# EAGLE board eg3301_pcb v4 (EAGLE 9.7.0)
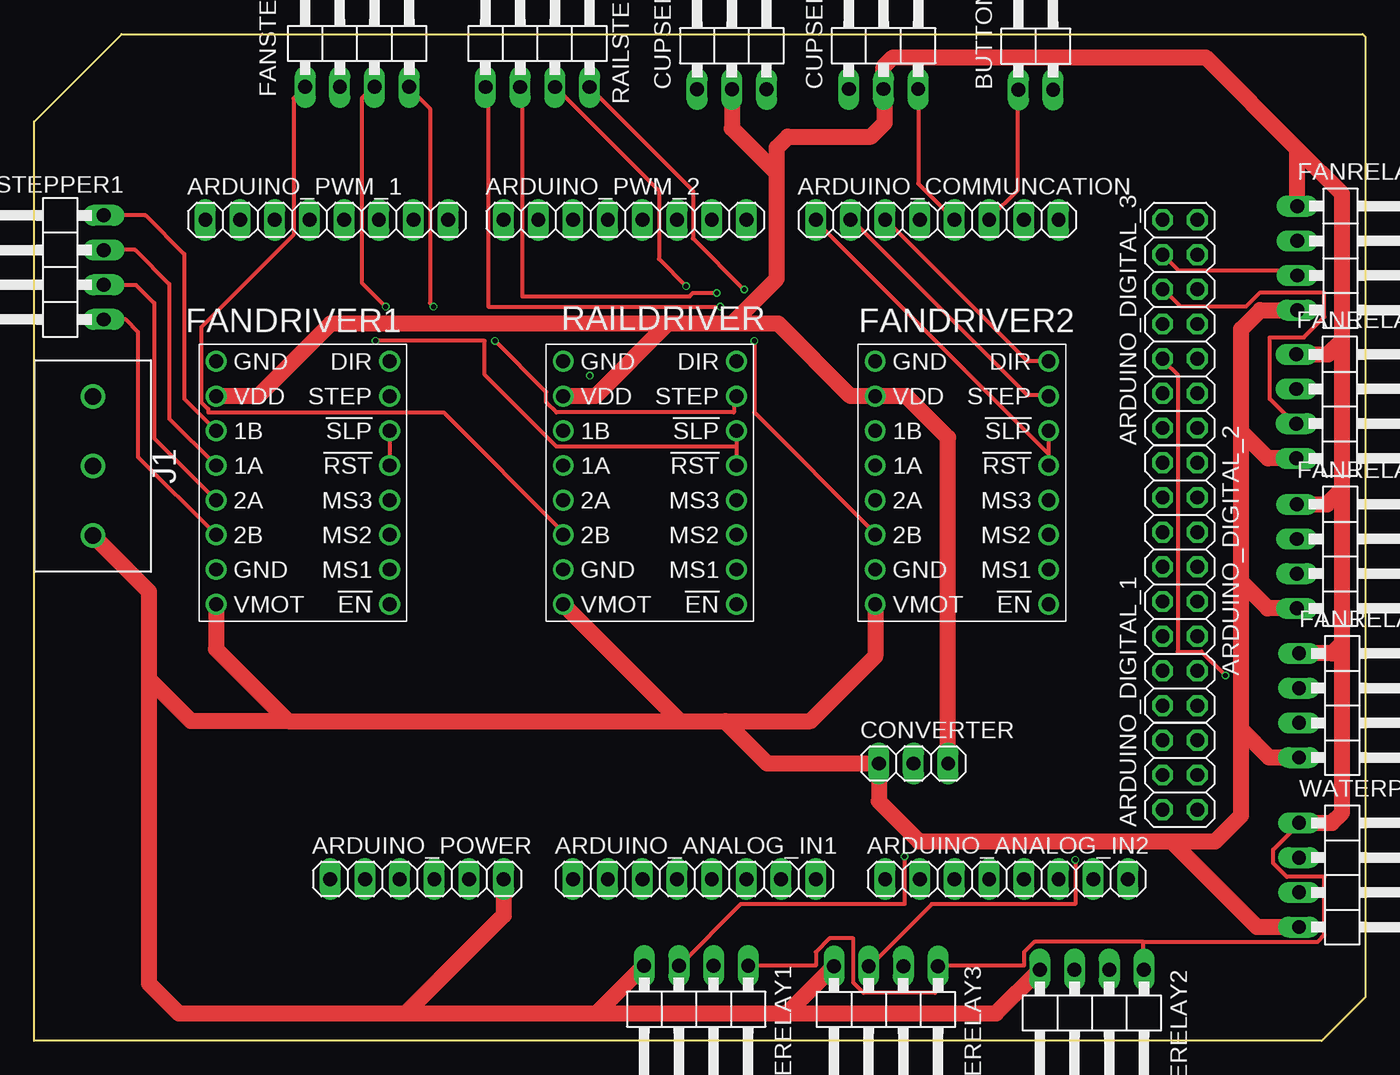
[diagram p0: board, top side]
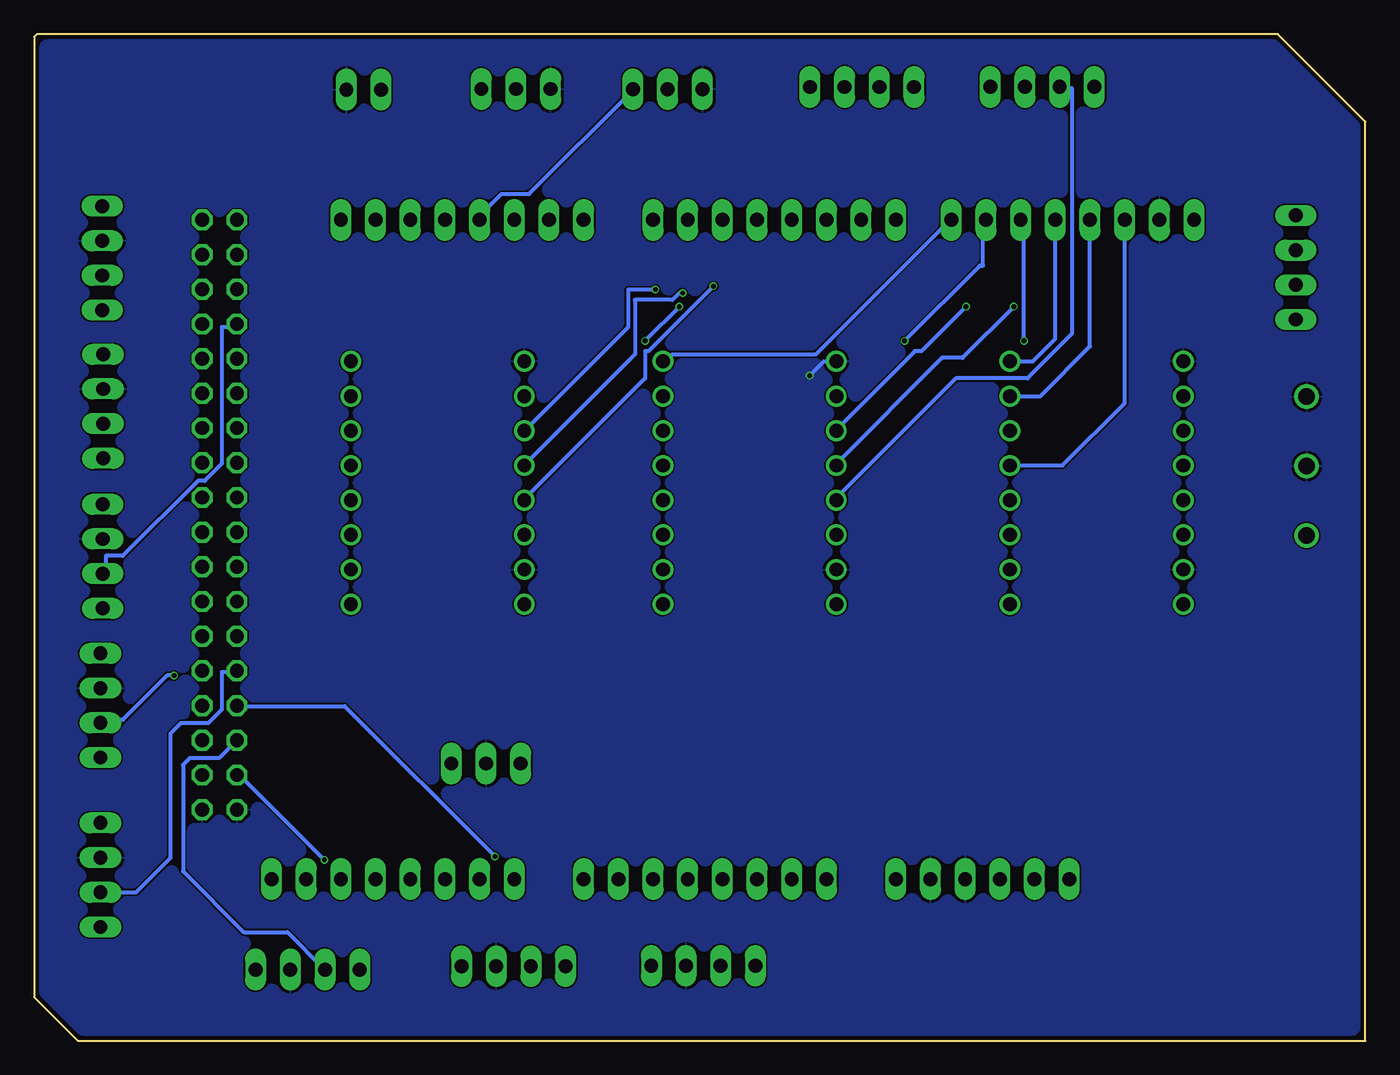
[diagram p1: board, bottom side, seen from below]

Size 97.5 x 73.7 mm. Coordinates in mm from the lower left corner, seen from the top.
Outline: 97.5,73.5 97.5,3.2 94.3,0 0,0 0,67.3 6.4,73.7 97.3,73.7 97.5,73.5
Copper layers (1*16): Top / Bottom
Stack-up Default Layer Stack: Top User Defined 0.035mm / Dielectric-1 User Defined 1.5mm / Bottom User Defined 0.035mm
Design rules "PCBWay_2L_100um-Track": minimum track width 0.1mm, minimum drill 0.3mm, track to track 0.1mm, track to pad 0.1mm, pad to pad 0.1mm, via to via 0.1mm, smd to smd 0mil, copper to edge 0.3mm, drill to drill 10mil, minimum pad ring 6mil, minimum via ring 0.1mm, stop-mask expansion 2mil, vias tented up to drill 0.45mm, thermal gap 0.2mm

## Footprints (pad centres in the part's own frame; a part is rotated, then mirrored left to right if it is on the bottom)
1X08 = drill 1.016 long: 1 -8.89,0; 2 -6.35,0; 3 -3.81,0; 4 -1.27,0; 5 1.27,0; 6 3.81,0; 7 6.35,0; 8 8.89,0
2X03 = drill 1.016 octagon: 1 -2.54,-1.27; 2 -2.54,1.27; 3 0,-1.27; 4 0,1.27; 5 2.54,-1.27; 6 2.54,1.27
2X08 = drill 1.016 octagon: 1 -8.89,-1.27; 2 -8.89,1.27; 3 -6.35,-1.27; 4 -6.35,1.27; 5 -3.81,-1.27; 6 -3.81,1.27; 7 -1.27,-1.27; 8 -1.27,1.27; 9 1.27,-1.27; 10 1.27,1.27; 11 3.81,-1.27; 12 3.81,1.27; 13 6.35,-1.27; 14 6.35,1.27; 15 8.89,-1.27; 16 8.89,1.27
2X07 = drill 1.016 octagon: 1 -7.62,-1.27; 2 -7.62,1.27; 3 -5.08,-1.27; 4 -5.08,1.27; 5 -2.54,-1.27; 6 -2.54,1.27; 7 0,-1.27; 8 0,1.27; 9 2.54,-1.27; 10 2.54,1.27; 11 5.08,-1.27; 12 5.08,1.27; 13 7.62,-1.27; 14 7.62,1.27
1X06 = drill 1.016 long: 1 -6.35,0; 2 -3.81,0; 3 -1.27,0; 4 1.27,0; 5 3.81,0; 6 6.35,0
1X02/90 = drill 1.016 long: 1 -1.27,-3.81; 2 1.27,-3.81
1X03 = drill 1.016 long: 1 -2.54,0; 2 0,0; 3 2.54,0
1X03/90 = drill 1.016 long: 1 -2.54,-3.81; 2 0,-3.81; 3 2.54,-3.81
A4988 = drill 1.016: 1 -6.35,8.89; 2 -6.35,6.35; 3 -6.35,3.81; 4 -6.35,1.27; 5 -6.35,-1.27; 6 -6.35,-3.81; 7 -6.35,-6.35; 8 -6.35,-8.89; 9 6.35,-8.89; 10 6.35,-6.35; 11 6.35,-3.81; 12 6.35,-1.27; 13 6.35,1.27; 14 6.35,3.81; 15 6.35,6.35; 16 6.35,8.89
1X04/90 = drill 1.016 long: 1 -3.81,-3.81; 2 -1.27,-3.81; 3 1.27,-3.81; 4 3.81,-3.81
TERMBLK_508-3N = drill 1.2: 1 0,0; 2 5.08,0; 3 10.16,0

## Placement (x,y rotation side)
ARDUINO_ANALOG_IN1  PINHD-1X8  [1X08]  48.36,11.84 0 top
ARDUINO_ANALOG_IN2  PINHD-1X8  [1X08]  71.22,11.84 0 top
ARDUINO_COMMUNCATION  PINHD-1X8  [1X08]  66.14,60.1 0 top
ARDUINO_DIGITAL_1  PINHD-2X3  [2X03]  83.92,19.46 90 top
ARDUINO_DIGITAL_2  PINHD-2X8  [2X08]  83.92,33.43 90 top
ARDUINO_DIGITAL_3  PINHD-2X7  [2X07]  83.92,52.48 90 top
ARDUINO_POWER  PINHD-1X6  [1X06]  28.04,11.84 0 top
ARDUINO_PWM_1  PINHD-1X8  [1X08]  21.43,60.1 0 top
ARDUINO_PWM_2  PINHD-1X8  [1X08]  43.28,60.1 0 top
BUTTON  PINHD-1X2/90  [1X02/90]  73.36,73.45 0 top
CONVERTER  PINHD-1X3  [1X03]  64.4,20.3 0 top
CUPSERVO1  PINHD-1X3/90  [1X03/90]  62.21,73.49 0 top
CUPSERVO2  PINHD-1X3/90  [1X03/90]  51.1,73.48 0 top
FANDRIVER1  1182-A4988  [A4988]  19.68,40.85 180 top
FANDRIVER2  1182-A4988  [A4988]  67.95,40.85 180 top
FANRELAY1  PINHD-1X4/90  [1X04/90]  96.32,57.3 270 top
FANRELAY2  PINHD-1X4/90  [1X04/90]  96.26,46.45 270 top
FANRELAY3  PINHD-1X4/90  [1X04/90]  96.29,35.47 270 top
FANRELAY4  PINHD-1X4/90  [1X04/90]  96.45,24.55 270 top
FANSTEPPER1  PINHD-1X4/90  [1X04/90]  1.28,56.62 90 top
FANSTEPPER2  PINHD-1X4/90  [1X04/90]  23.66,73.65 0 top
J1  2828XX-3282837-3  [TERMBLK_508-3N]  4.3,37 90 top
RAILDRIVER  1182-A4988  [A4988]  45.1,40.85 180 top
RAILSTEPPER  PINHD-1X4/90  [1X04/90]  36.87,73.64 0 top
VALVERELAY1  PINHD-1X4/90  [1X04/90]  48.49,1.68 180 top
VALVERELAY2  PINHD-1X4/90  [1X04/90]  77.47,1.4 180 top
VALVERELAY3  PINHD-1X4/90  [1X04/90]  62.39,1.65 180 top
WATERPUMPRELAY  PINHD-1X4/90  [1X04/90]  96.45,12.14 270 top

## Library data of the parts
ARDUINO_ANALOG_IN1 ARDUINO_ANALOG_IN2 ARDUINO_COMMUNCATION ARDUINO_PWM_1 ARDUINO_PWM_2 = Connector; CATEGORY: Headers; DESCRIPTION: Header, Straight, 8 Position; MANUFACTURER: Generic; MPN: Generic; OPERATING_TEMPERATURE: Generic; PART_STATUS: Active; PITCH: 0.100" (2.54mm); ROHS_COMPLIANCE: Generic; SERIES: Generic; SUB-CATEGORY: Headers, Male Pins; TYPE: Board to Board or Cable, Unshrouded, Through Hole, Straight
ARDUINO_DIGITAL_1 = Connector; CATEGORY: Headers; DESCRIPTION: Header, Straight, 2x3 Position; MANUFACTURER: Generic; MPN: Generic; OPERATING_TEMPERATURE: Generic; PART_STATUS: Active; PITCH: 0.100" (2.54mm); ROHS_COMPLIANCE: Generic; SERIES: Generic; SUB-CATEGORY: Headers, Male Pins; TYPE: Board to Board or Cable, Unshrouded, Through Hole, Straight
ARDUINO_DIGITAL_2 = Connector; CATEGORY: Headers; DESCRIPTION: Header, Straight, 2x8 Position; MANUFACTURER: Generic; MPN: Generic; OPERATING_TEMPERATURE: Generic; PART_STATUS: Active; PITCH: 0.100" (2.54mm); ROHS_COMPLIANCE: Generic; SERIES: Generic; SUB-CATEGORY: Headers, Male Pins; TYPE: Board to Board or Cable, Unshrouded, Through Hole, Straight
ARDUINO_DIGITAL_3 = Connector; CATEGORY: Headers; DESCRIPTION: Header, Straight, 2x7 Position; MANUFACTURER: Generic; MPN: Generic; OPERATING_TEMPERATURE: Generic; PART_STATUS: Active; PITCH: 0.100" (2.54mm); ROHS_COMPLIANCE: Generic; SERIES: Generic; SUB-CATEGORY: Headers, Male Pins; TYPE: Board to Board or Cable, Unshrouded, Through Hole, Straight
ARDUINO_POWER = Connector; CATEGORY: Headers; DESCRIPTION: Header, Straight, 6 Position; MANUFACTURER: Generic; MPN: Generic; OPERATING_TEMPERATURE: Generic; PART_STATUS: Active; PITCH: 0.100" (2.54mm); ROHS_COMPLIANCE: Generic; SERIES: Generic; SUB-CATEGORY: Headers, Male Pins; TYPE: Board to Board or Cable, Unshrouded, Through Hole, Straight
BUTTON = Connector; CATEGORY: Headers; DESCRIPTION: Header, Right Angle, 2 Position; MANUFACTURER: Generic; MPN: Generic; OPERATING_TEMPERATURE: Generic; PART_STATUS: Active; PITCH: 0.100" (2.54mm); ROHS_COMPLIANCE: Generic; SERIES: Generic; SUB-CATEGORY: Headers, Male Pins; TYPE: Board to Board or Cable, Unshrouded, Through Hole, Right Angle
CONVERTER = Connector; CATEGORY: Headers; DESCRIPTION: Header, Straight, 3 Position; MANUFACTURER: Generic; MPN: Generic; OPERATING_TEMPERATURE: Generic; PART_STATUS: Active; PITCH: 0.100" (2.54mm); ROHS_COMPLIANCE: Generic; SERIES: Generic; SUB-CATEGORY: Headers, Male Pins; TYPE: Board to Board or Cable, Unshrouded, Through Hole, Straight
CUPSERVO1 CUPSERVO2 = Connector; CATEGORY: Headers; DESCRIPTION: Header, Right Angle, 3 Position; MANUFACTURER: Generic; MPN: Generic; OPERATING_TEMPERATURE: Generic; PART_STATUS: Active; PITCH: 0.100" (2.54mm); ROHS_COMPLIANCE: Generic; SERIES: Generic; SUB-CATEGORY: Headers, Male Pins; TYPE: Board to Board or Cable, Unshrouded, Through Hole, Right Angle
FANDRIVER1 FANDRIVER2 RAILDRIVER = pololu-stepper-driver
FANRELAY1-FANRELAY4 FANSTEPPER1 FANSTEPPER2 RAILSTEPPER VALVERELAY1-VALVERELAY3 WATERPUMPRELAY = Connector; CATEGORY: Headers; DESCRIPTION: Header, Right Angle, 4 Position; MANUFACTURER: Generic; MPN: Generic; OPERATING_TEMPERATURE: Generic; PART_STATUS: Active; PITCH: 0.100" (2.54mm); ROHS_COMPLIANCE: Generic; SERIES: Generic; SUB-CATEGORY: Headers, Male Pins; TYPE: Board to Board or Cable, Unshrouded, Through Hole, Right Angle
J1 = Connector; CATEGORY: Connector; DESCRIPTION: TERM BLK 3P SIDE ENT 5.08mm PCB; MANUFACTURER: TE Connectivity; MPN: 282837-3; OPERATING_TEMPERATURE: -40°C to +105°C; PART_STATUS: Active; PITCH: 0.200" (5.08mm); ROHS_COMPLIANCE: RoHS Compliant; SERIES: Buchanan; SUBCATEGORY: Terminal Block; TYPE: Side Wire Entry

## Nets
1A_1: FANDRIVER1.12 FANSTEPPER1.3
1A_2: FANSTEPPER2.3 RAILDRIVER.12
1A_3: FANDRIVER2.12 RAILSTEPPER.2
1B_1: FANDRIVER1.11 FANSTEPPER1.4
1B_2: FANSTEPPER2.4 RAILDRIVER.11
1B_3: FANDRIVER2.11 RAILSTEPPER.4
2A_1: FANDRIVER1.13 FANSTEPPER1.2
2A_2: FANSTEPPER2.2 RAILDRIVER.13
2A_3: FANDRIVER2.13 RAILSTEPPER.3
2B_1: FANDRIVER1.14 FANSTEPPER1.1
2B_2: FANSTEPPER2.1 RAILDRIVER.14
2B_3: FANDRIVER2.14 RAILSTEPPER.1
3.3V: ARDUINO_POWER.2
5V: CONVERTER.3 CUPSERVO1.2 CUPSERVO2.2 FANDRIVER1.10 FANDRIVER2.10 FANRELAY1.1 FANRELAY2.1 FANRELAY3.1 FANRELAY4.1 RAILDRIVER.10 VALVERELAY1.1 VALVERELAY2.1 VALVERELAY3.1 WATERPUMPRELAY.1
12V: ARDUINO_POWER.6 CONVERTER.1 FANDRIVER1.16 FANDRIVER2.16 FANRELAY1.4 FANRELAY2.4 FANRELAY3.4 FANRELAY4.4 J1.1 RAILDRIVER.16 VALVERELAY1.4 VALVERELAY2.4 VALVERELAY3.4 WATERPUMPRELAY.4
!EN_1: FANDRIVER1.1
!EN_2: RAILDRIVER.1
!EN_3: FANDRIVER2.1
A0: ARDUINO_ANALOG_IN1.1
A1: ARDUINO_ANALOG_IN1.2
A2: ARDUINO_ANALOG_IN1.3
A3: ARDUINO_ANALOG_IN1.4
A4: ARDUINO_ANALOG_IN1.5
A5: ARDUINO_ANALOG_IN1.6
A6: ARDUINO_ANALOG_IN1.7
A7: ARDUINO_ANALOG_IN1.8
A8: ARDUINO_ANALOG_IN2.1
A9: ARDUINO_ANALOG_IN2.2
A10: ARDUINO_ANALOG_IN2.3
A11: ARDUINO_ANALOG_IN2.4
A12: ARDUINO_ANALOG_IN2.5
A13: ARDUINO_ANALOG_IN2.6
A14: ARDUINO_ANALOG_IN2.7
A15: ARDUINO_ANALOG_IN2.8
ARDUINO5V: ARDUINO_DIGITAL_3.13
AREF: ARDUINO_PWM_1.1
D0: ARDUINO_COMMUNCATION.8
D1: ARDUINO_COMMUNCATION.7
D2: ARDUINO_COMMUNCATION.6 BUTTON.1
D3: ARDUINO_COMMUNCATION.5 CUPSERVO1.3
D4: ARDUINO_COMMUNCATION.4 CUPSERVO2.3
D5: ARDUINO_COMMUNCATION.3 FANDRIVER2.8
D6: ARDUINO_COMMUNCATION.2 FANDRIVER2.7
D7: ARDUINO_COMMUNCATION.1 FANDRIVER2.5 FANDRIVER2.6
D8: ARDUINO_PWM_1.8 RAILDRIVER.8
D9: ARDUINO_PWM_1.7 RAILDRIVER.7
D10: ARDUINO_PWM_1.6 RAILDRIVER.5 RAILDRIVER.6
D11: ARDUINO_PWM_1.5 FANDRIVER1.8
D12: ARDUINO_PWM_1.4 FANDRIVER1.7
D13: ARDUINO_PWM_1.3 FANDRIVER1.5 FANDRIVER1.6
D14: ARDUINO_PWM_2.1
D15: ARDUINO_PWM_2.2
D16: ARDUINO_PWM_2.3
D17: ARDUINO_PWM_2.4
D18: ARDUINO_PWM_2.5
D19: ARDUINO_PWM_2.6
D20: ARDUINO_PWM_2.7
D21: ARDUINO_PWM_2.8
D22: ARDUINO_DIGITAL_3.12 FANRELAY1.3
D23: ARDUINO_DIGITAL_3.11
D24: ARDUINO_DIGITAL_3.10 FANRELAY2.3
D25: ARDUINO_DIGITAL_3.9
D26: ARDUINO_DIGITAL_3.8 FANRELAY3.3
D27: ARDUINO_DIGITAL_3.7
D28: ARDUINO_DIGITAL_3.6 FANRELAY4.3
D29: ARDUINO_DIGITAL_3.5
D30: ARDUINO_DIGITAL_3.4
D31: ARDUINO_DIGITAL_3.3
D32: ARDUINO_DIGITAL_3.2
D33: ARDUINO_DIGITAL_3.1
D34: ARDUINO_DIGITAL_2.16
D35: ARDUINO_DIGITAL_2.15
D36: ARDUINO_DIGITAL_2.14
D37: ARDUINO_DIGITAL_2.13
D38: ARDUINO_DIGITAL_2.12
D39: ARDUINO_DIGITAL_2.11
D40: ARDUINO_DIGITAL_2.10
D41: ARDUINO_DIGITAL_2.9
D42: ARDUINO_DIGITAL_2.8
D43: ARDUINO_DIGITAL_2.7
D44: ARDUINO_DIGITAL_2.6
D45: ARDUINO_DIGITAL_2.5
D46: ARDUINO_DIGITAL_2.4 WATERPUMPRELAY.3
D47: ARDUINO_DIGITAL_2.3
D48: ARDUINO_DIGITAL_2.2 VALVERELAY1.3
D49: ARDUINO_DIGITAL_2.1
D50: ARDUINO_DIGITAL_1.6 VALVERELAY2.3
D51: ARDUINO_DIGITAL_1.5
D52: ARDUINO_DIGITAL_1.4 VALVERELAY3.3
D53: ARDUINO_DIGITAL_1.3
GND: ARDUINO_DIGITAL_1.1 ARDUINO_DIGITAL_1.2 ARDUINO_POWER.4 ARDUINO_POWER.5 ARDUINO_PWM_1.2 BUTTON.2 CONVERTER.2 CUPSERVO1.1 CUPSERVO2.1 FANDRIVER1.9 FANDRIVER1.15 FANDRIVER2.9 FANDRIVER2.15 FANRELAY1.2 FANRELAY2.2 FANRELAY3.2 FANRELAY4.2 J1.2 J1.3 RAILDRIVER.9 RAILDRIVER.15 VALVERELAY1.2 VALVERELAY2.2 VALVERELAY3.2 WATERPUMPRELAY.2
MS1_1: FANDRIVER1.2
MS1_2: RAILDRIVER.2
MS1_3: FANDRIVER2.2
MS2_1: FANDRIVER1.3
MS2_2: RAILDRIVER.3
MS2_3: FANDRIVER2.3
MS3_1: FANDRIVER1.4
MS3_2: RAILDRIVER.4
MS3_3: FANDRIVER2.4
RESET: ARDUINO_POWER.1

## Tracks (layer width: path | path; a pad name or v marks a point on that pad's centre or on a via)
1A_1
  Top 0.305: FANSTEPPER1.3 7.4,57.9 9.9,55.4 9.9,45.55 FANDRIVER1.12
1A_2  (via drill 0.35)
  Top 0.305: v25.75,53.75 24,55.5 24,69 24.75,69.75 FANSTEPPER2.3
  Bottom 0.305: v25.75,53.75 29.5,50 31,50 38.75,42.25 RAILDRIVER.12
1A_3  (via drill 0.35)
  Top 0.305: v50,54.75 48.25,54.75 48,54.5 35.75,54.5 35.75,69.75 RAILSTEPPER.2
  Bottom 0.305: v50,54.75 50.25,54.75 50.75,54.25 53.5,54.25 53.5,50.25 61.5,42.25 FANDRIVER2.12
1B_1
  Top 0.305: FANSTEPPER1.4 8.17,60.43 11,57.6 11,46.99 FANDRIVER1.11
1B_2  (via drill 0.35)
  Top 0.305: v29.25,53.75 29,54 29,68.25 27.5,69.75 FANSTEPPER2.4
  Bottom 0.305: v29.25,53.75 32.5,50.5 33,50.5 38.75,44.75 RAILDRIVER.11
1B_3  (via drill 0.35)
  Top 0.305: v52,55 48.25,58.75 48.25,62.25 40.75,69.75 RAILSTEPPER.4
  Bottom 0.305: v52,55 54,55 54,52.25 61.5,44.75 FANDRIVER2.11
2A_1
  Top 0.305: FANSTEPPER1.2 7.45,55.35 8.8,54 8.8,44.1 FANDRIVER1.13
2A_2
  Bottom 0.305: RAILDRIVER.13 38.75,39.75 30,48.5 24.75,48.5 21.5,51.75 21.5,69.75 22.25,69.75 FANSTEPPER2.2
2A_3  (via drill 0.35)
  Top 0.305: v47.75,55.25 45.75,57.25 45.75,62.25 38.25,69.75 RAILSTEPPER.3
  Bottom 0.305: v47.75,55.25 52.5,50.5 52.75,50.5 52.75,48.5 61.5,39.75 FANDRIVER2.13
2B_1
  Top 0.305: FANSTEPPER1.1 6.69,52.81 7.6,51.9 7.6,42.77 FANDRIVER1.14
2B_2
  Top 0.305: RAILDRIVER.14 38.75,37.25 30,46 12.75,46 12.75,46.25 12.25,46.75 12.25,52.25 19,59 19,69 19.75,69.75 FANSTEPPER2.1
2B_3  (via drill 0.35)
  Top 0.305: v52.75,51.25 52.75,46 61.5,37.25 FANDRIVER2.14 | v50.25,53.75 33.25,53.75 33.25,69.75 RAILSTEPPER.1
  Bottom 0.305: v50.25,53.75 v52.75,51.25
5V
  Top 0.305: 81.25,7.25 73.25,7.25 72.5,6.5 72.5,5.5 66.25,5.5 VALVERELAY3.1 66,5.25 66,3.5 60.75,3.5 60,4.25 60,7.5 58.25,7.5 57.25,6.5 57.25,5.5 52.5,5.5 VALVERELAY1.1 | 81.25,7.25 81.25,5.25 VALVERELAY2.1 | 81.25,7.25 94,7.25 94.5,7.75 94.5,12 91.75,12 90.75,13 90.75,14 92.5,15.75 WATERPUMPRELAY.1
  Top 1.16: CONVERTER.3 66.94,44.16 63.9,47.2 FANDRIVER2.10 59.8,47.2 54.5,52.5 51.1,52.5 | 51.1,52.5 46.4,52.5 | 46.4,52.5 41.1,47.2 RAILDRIVER.10 | 46.4,52.5 21.7,52.5 16.4,47.2 FANDRIVER1.10 | 51.1,52.5 54.4,55.8 54.4,63.5 | 54.4,63.5 54.4,65.4 55.2,66.2 61.3,66.2 62.3,67.2 62.3,69.59 CUPSERVO1.2 62.21,71.31 62.9,72 85.8,72 92.51,65.29 | CUPSERVO2.2 51.1,66.8 54.4,63.5 | 92.51,65.29 95.8,62 95.8,51.3 | 95.8,29.1 95.8,40.4 | 95.8,29.1 95.06,28.36 FANRELAY4.1 | WATERPUMPRELAY.1 95.05,15.95 95.8,16.7 95.8,29.1 | FANRELAY3.1 94.68,39.28 95.8,40.4 | 95.8,40.4 95.8,51.3 | FANRELAY2.1 94.76,50.26 95.8,51.3 | FANRELAY1.1 92.51,65.29
12V
  Top 1.16: J1.1 8.4,32.9 8.4,26.5 | 18.6,23.4 47.31,23.4 | 47.31,23.4 50.6,23.4 | 50.6,23.4 56.86,23.4 61.6,28.14 FANDRIVER2.16 | 50.6,23.4 53.7,20.3 CONVERTER.1 61.86,17.54 64.8,14.6 83.3,14.6 | RAILDRIVER.16 47.31,23.4 | FANDRIVER1.16 13.33,28.67 18.6,23.4 | 18.6,23.4 11.5,23.4 8.4,26.5 | 83.3,14.6 86.5,14.6 88.4,16.5 88.4,22.8 | 88.4,22.8 88.4,33.6 | 88.4,33.6 88.4,44.6 | 88.4,44.6 88.4,52.1 89.8,53.5 FANRELAY1.4 | FANRELAY2.4 90.36,42.64 88.4,44.6 | FANRELAY3.4 90.34,31.66 88.4,33.6 | FANRELAY4.4 90.46,20.74 88.4,22.8 | WATERPUMPRELAY.4 89.57,8.33 83.3,14.6 | 8.4,26.5 8.4,4.2 10.6,2 27.2,2 | 27.2,2 41.2,2 | 41.2,2 55.12,2 | 55.12,2 70.45,2 VALVERELAY2.4 | VALVERELAY1.4 41.2,2.01 41.2,2 | VALVERELAY3.4 55.12,2 | ARDUINO_POWER.6 34.39,9.19 27.2,2
D2
  Top 0.305: ARDUINO_COMMUNCATION.6 70,60.25 72,62.25 72,69.5 BUTTON.1
D3
  Top 0.305: CUPSERVO1.3 64.75,62.75 67.25,60.25 ARDUINO_COMMUNCATION.5
D4
  Bottom 0.305: CUPSERVO2.3 53.75,69.5 61.25,62 63.25,62 65,60.25 ARDUINO_COMMUNCATION.4
D5
  Top 0.305: ARDUINO_COMMUNCATION.3 62.5,60 72.75,49.75 74.25,49.75 FANDRIVER2.8
D6
  Top 0.305: ARDUINO_COMMUNCATION.2 60,60 72.75,47.25 74.25,47.25 FANDRIVER2.7
D7
  Top 0.305: FANDRIVER2.6 74.3,43 | 74.3,43 FANDRIVER2.5 | ARDUINO_COMMUNCATION.1 57.25,60 74.25,43 74.3,43
D8
  Bottom 0.305: ARDUINO_PWM_1.8 30.5,60 40.25,50.25 50.75,50.25 51.25,49.75 RAILDRIVER.8
D9  (via drill 0.35)
  Top 0.305: v33.75,51.25 37.5,47.5 37.5,46.75 38.25,46 51.25,46 51.25,47 RAILDRIVER.7
  Bottom 0.305: v33.75,51.25 28.25,56.75 28,56.75 28,60 ARDUINO_PWM_1.7
D10  (via drill 0.35)
  Top 0.305: RAILDRIVER.6 51.45,43.5 | 51.45,43.5 RAILDRIVER.5 | v25,51.25 33,51.25 33,48.75 38.25,43.5 51.45,43.5
  Bottom 0.305: v25,51.25 25,60 ARDUINO_PWM_1.6
D11
  Bottom 0.305: FANDRIVER1.8 24.36,49.74 22.7,51.4 ARDUINO_PWM_1.5
D12
  Bottom 0.305: FANDRIVER1.7 23.8,47.2 20.16,50.84 ARDUINO_PWM_1.4
D13
  Top 0.305: FANDRIVER1.6 FANDRIVER1.5
  Bottom 0.305: FANDRIVER1.5 22.18,42.12 17.62,46.67 ARDUINO_PWM_1.3
D22
  Top 0.305: ARDUINO_DIGITAL_3.12 83.81,56.4 92.14,56.4 FANRELAY1.3
D24
  Top 0.305: ARDUINO_DIGITAL_3.10 82.75,55 84,53.75 88.75,53.75 89.75,54.75 94.5,54.75 94.5,53 93,51.5 90.5,51.5 90.5,47 92.25,45.25 FANRELAY2.3
D26
  Bottom 0.305: FANRELAY3.3 92.25,34.25 92.25,35.5 91,35.5 85.5,41 85,41 83.75,42.25 83.75,52.25 82.75,52.25 ARDUINO_DIGITAL_3.8
D28  (via drill 0.35)
  Top 0.305: v87.25,26.75 85.5,28.5 83.75,28.5 83.75,48.75 82.75,49.75 ARDUINO_DIGITAL_3.6
  Bottom 0.305: v87.25,26.75 87.75,26.75 91,23.5 92.5,23.5 FANRELAY4.3
D46
  Bottom 0.305: ARDUINO_DIGITAL_2.4 82.75,27 83.75,27 83.75,24.25 84.75,23.25 86.75,23.25 87.5,22.5 87.5,13.4 90.03,10.87 WATERPUMPRELAY.3
D48  (via drill 0.35)
  Top 0.305: v63.75,13.5 63.75,10 51.75,10 47.25,5.5 VALVERELAY1.3
  Bottom 0.305: v63.75,13.5 74.75,24.5 82.5,24.5 ARDUINO_DIGITAL_2.2
D50
  Bottom 0.305: VALVERELAY2.3 76.25,5.25 78.95,7.95 82.15,7.95 86.6,12.4 86.6,20.2 86.1,20.7 83.95,20.7 ARDUINO_DIGITAL_1.6
D52  (via drill 0.35)
  Top 0.305: v76.25,13.25 76.25,10 65.75,10 61.25,5.5 VALVERELAY3.3
  Bottom 0.305: v76.25,13.25 82.25,19.25 82.5,19.25 ARDUINO_DIGITAL_1.4
GND  (via drill 0.35)
  Bottom 0.305: v40.7,48.7 39.66,49.74 RAILDRIVER.9
  pour Bottom: 0,0 97.5,0 97.5,73.7 0,73.7 0,73.6 0,73.7